# Altium PCB PCB1.PcbDoc (part 1 of 2)
Units mm, origin at the board's own origin, x right, y up, seen from the top; angles counter-clockwise.
Board outline 22.86 x 46 mm, 4 copper layers (Top Layer (sig), Plane (gnd), Plane2 (gnd), Bottom Layer (sig)), stack 0.603 mm thick; 57 components, 57 nets, 281 pads, 103 vias.
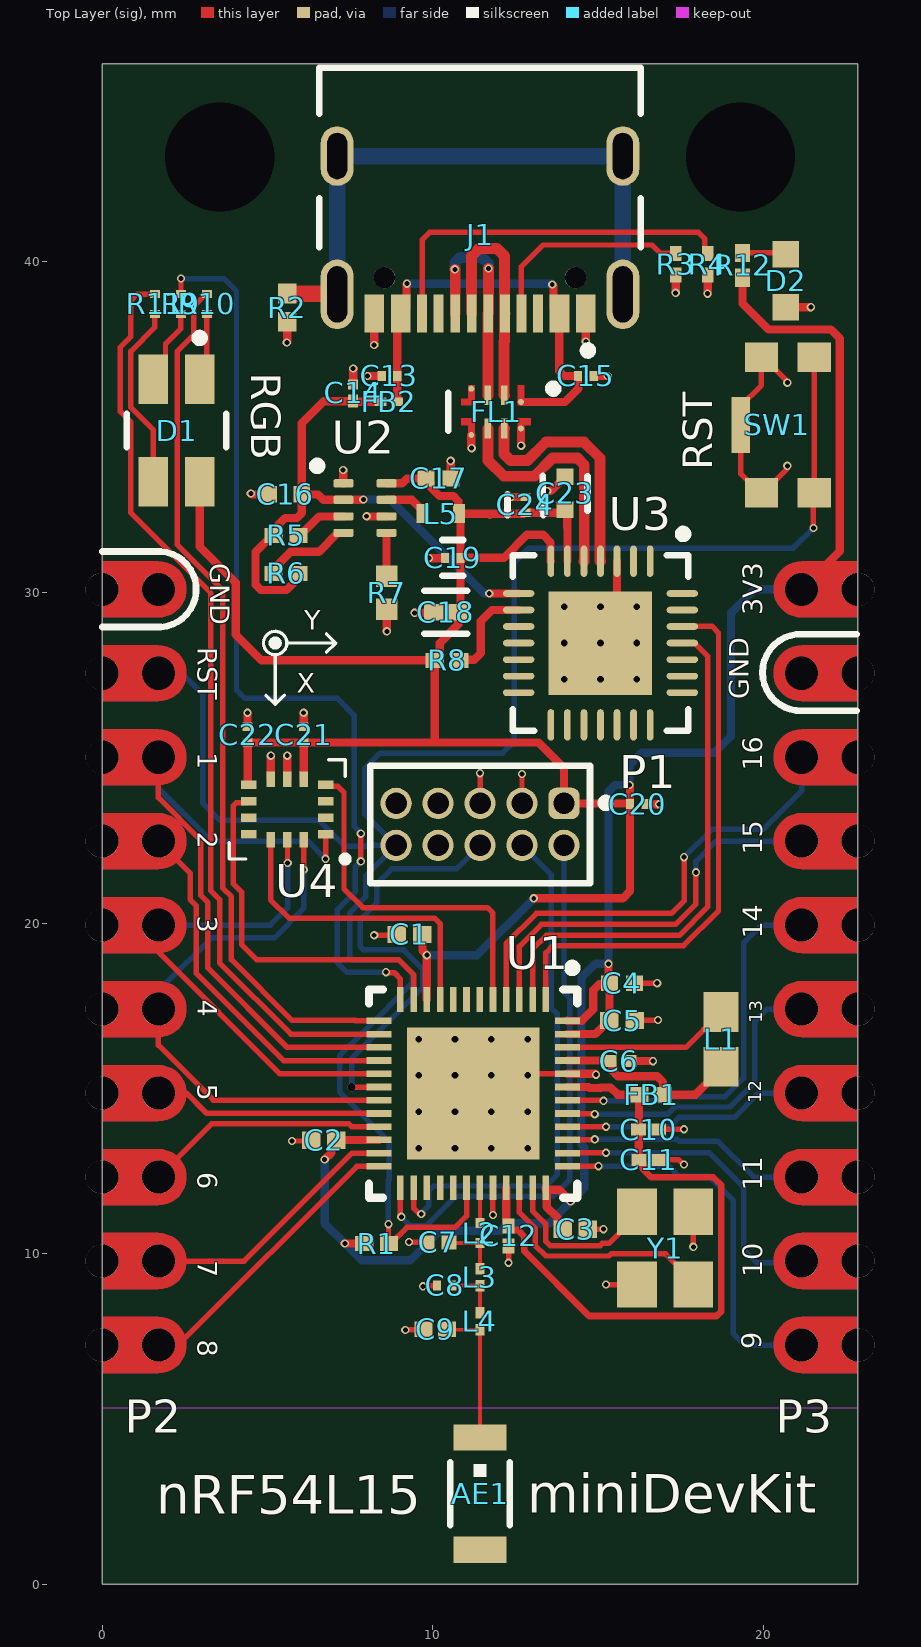
[diagram p0: Top Layer (sig) view]
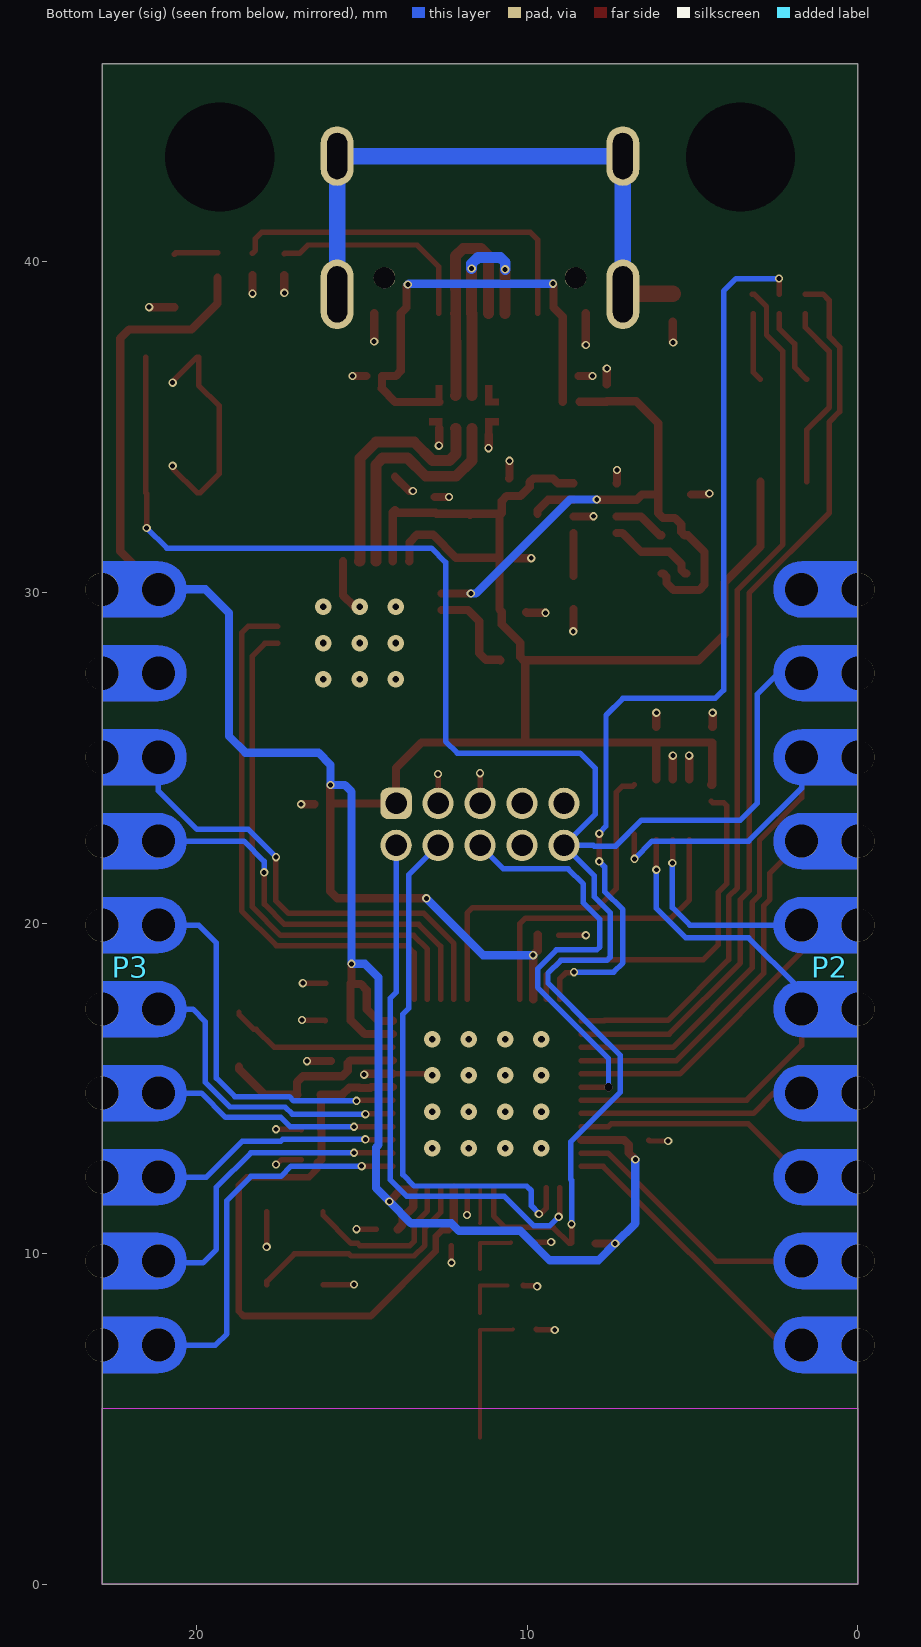
[diagram p1: Bottom Layer (sig) view, seen from below]
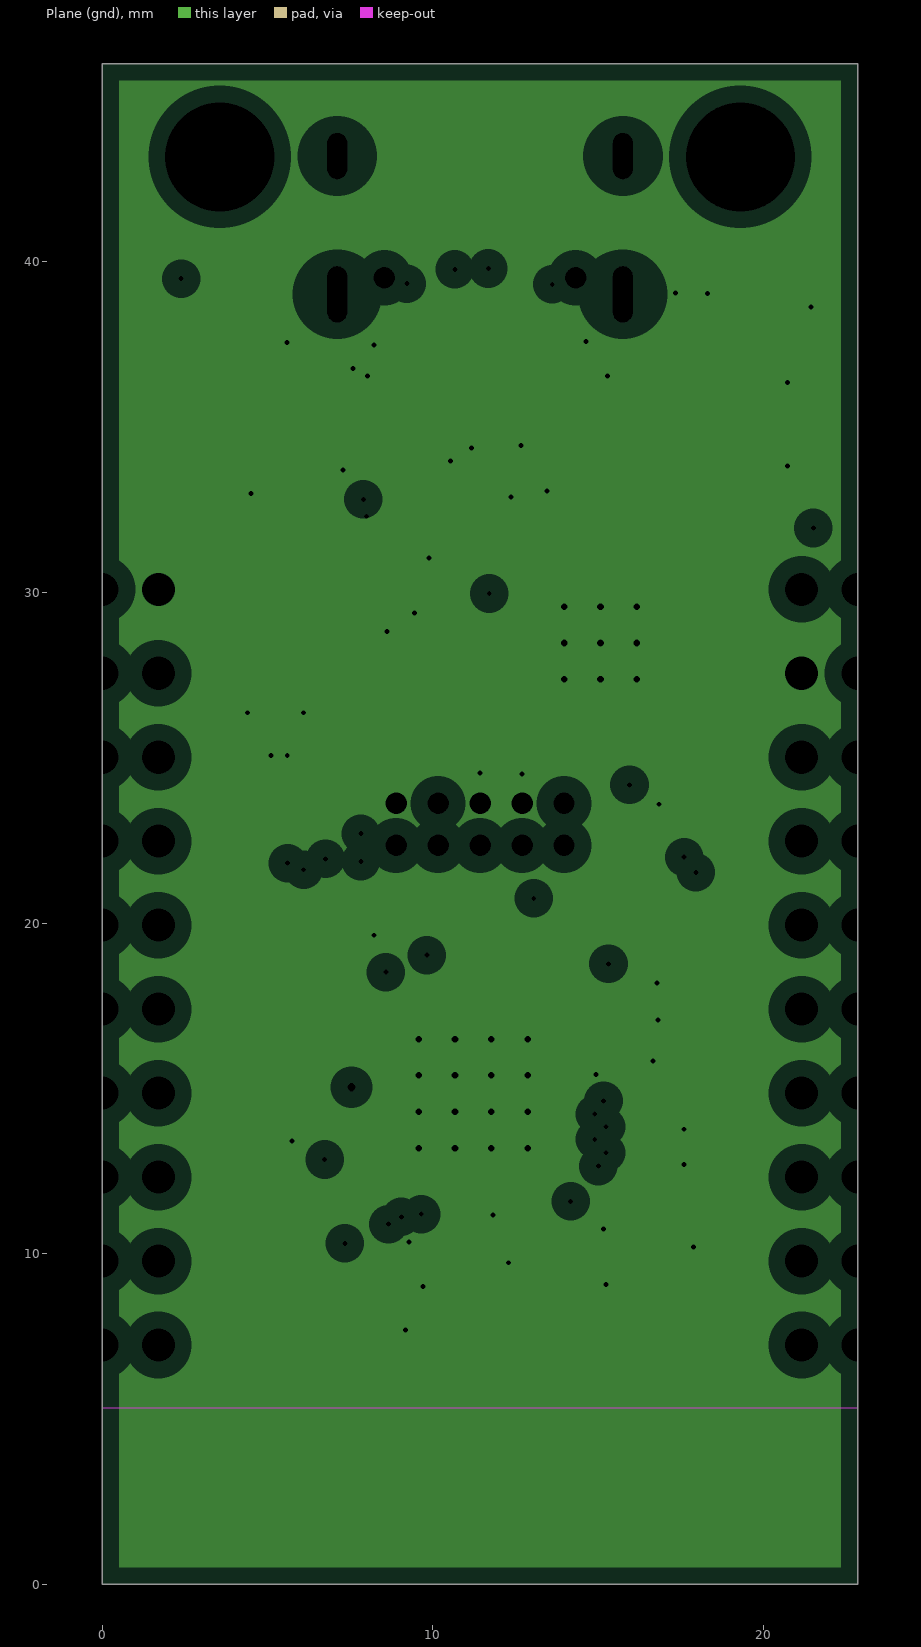
[diagram p2: Plane (gnd), clearances drawn from the general rule]
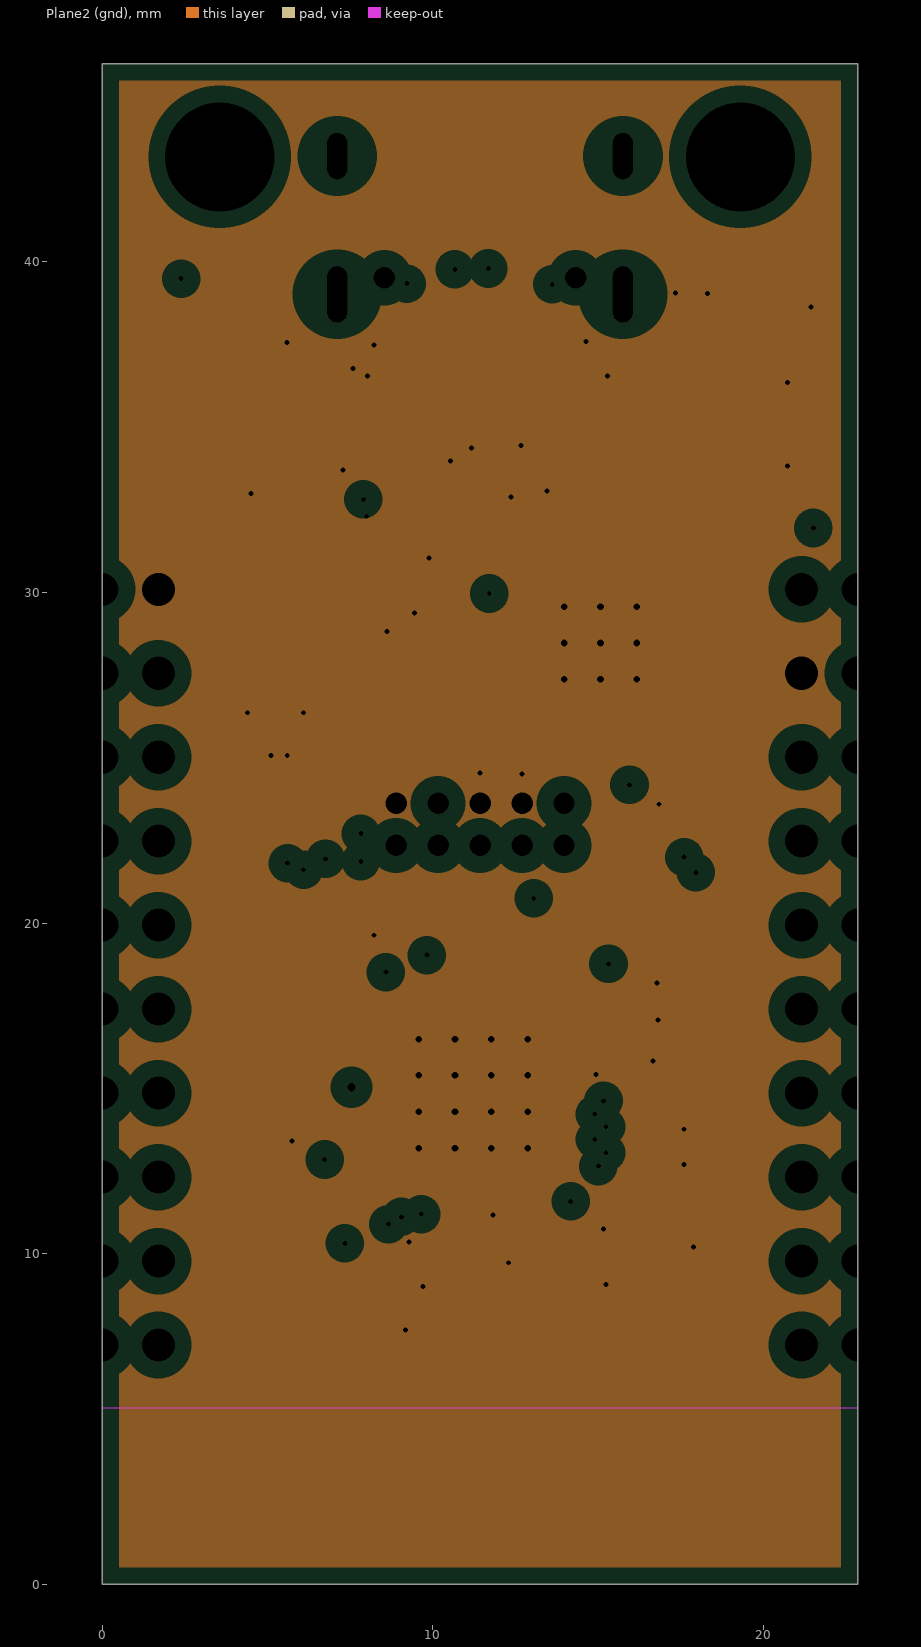
[diagram p3: Plane2 (gnd), clearances drawn from the general rule]
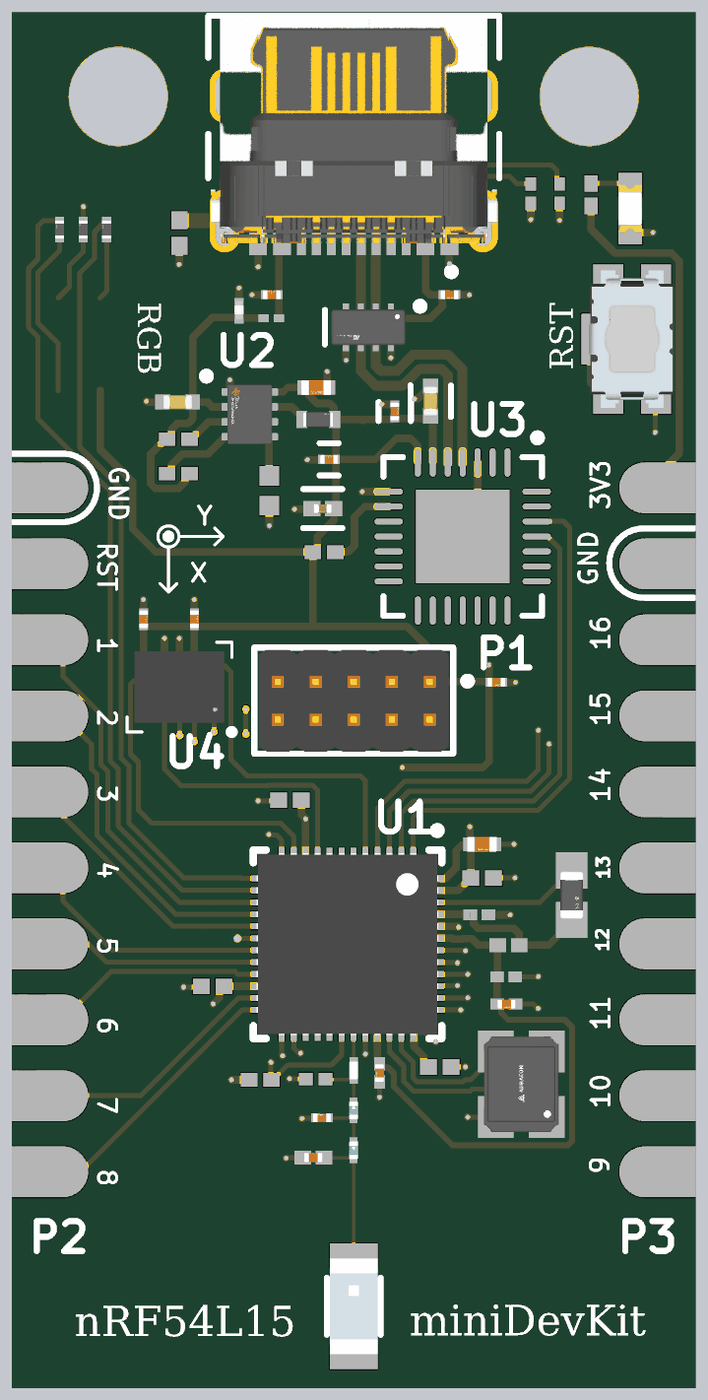
[diagram p4: 3D render of the assembled board from above, using the file's embedded part models]

## Layer stack, top to bottom
Top Solder: solder mask 0.0102, Solder Resist, Dk 3.5
Top Layer (sig): signal copper 0.0356
Dielectric 2: prepreg 0.0711, PP-006, Dk 4.1
Plane (gnd): plane copper 0.035, net GND
Dielectric 1: dielectric 0.32, FR-4, Dk 4.8
Plane2 (gnd): plane copper 0.035, net GND
Dielectric 3: prepreg 0.0711, PP-006, Dk 4.1
Bottom Layer (sig): signal copper 0.0356
Bottom Solder: solder mask 0.0102, Solder Resist, Dk 3.5

## Board outline
0,0 0,45.999 22.86,45.999 22.86,0

## Design rules (kind name [scope] priority, off if disabled: settings)
Clearance Clearance_1 [InComponent('P2','P3','J1')] p1: gap=0 ignorepadtopadclearanceinfootprint=FALSE
Clearance [All] p2: gap=0.15 ignorepadtopadclearanceinfootprint=FALSE
ComponentClearance [Not HasFootprint('Male_Headers_254_1x10') vs Not HasFootprint('Male_Headers_254_1x10')] p1: gap=0.254 collisioncheckmode=3 verticalgap=0.254 showdistances=FALSE
DiffPairsRouting [InDifferentialPairClass('All Differential Pairs')] p1: maxlimit=0.152 minlimit=0.152 mostfreqgap=0.152 toplayer_minwidth=0.33 toplayer_maxwidth=0.33 toplayer_prefwidth=0.33 bottomlayer_minwidth=0.33 bottomlayer_maxwidth=0.33 bottomlayer_prefwidth=0.33 impedanceprofiledriven=TRUE impedanceprofileid={C3FE540A-6831-4386-8260-1E42DD11D62C} impedanceprofilevalue=50.000000 maxuncoupledlength=12.7
HoleSize [All] p1: absolutevalues=TRUE maxlimit=6.3 minlimit=0.15 maxpercent=80.000 minpercent=20.000
HoleToHoleClearance [All] p1: gap=0.15 allowstackedmicrovias=TRUE
MinimumSolderMaskSliver [All] p1: minsoldermaskwidth=0.1
PlaneClearance [All] p1: clearance=0.508
PlaneConnect [All] p1: planeconnectstyle=Direct reliefexpansion=0.508 reliefentries=4 reliefconductorwidth=0.254 reliefairgap=0.254
PolygonConnect [All] p1: connectstyle=Relief reliefconductorwidth=0.254 reliefentries=4 polygonreliefangle="90 Angle" airgapwidth=0.254
RoutingVias [All] p1: holewidth=0.2 width=0.3 viastyle="Through Hole" minholewidth=0.15 minwidth=0.25 maxholewidth=1 maxwidth=1.5
ShortCircuit [Not InComponent('P2','P3') vs Not InComponent('P2','P3')] p1: allowed=FALSE
SilkToSolderMaskClearance [IsPad] p1: minsilkscreentomaskgap=0.15 clearancetoexposedcopper=TRUE
SolderMaskExpansion [All] p1: expansion=0.038 istentingtop=FALSE
SupplyNets "Schematic Supply Nets_3" [InNet('VBUS')] p1: voltage=0.000
SupplyNets "Schematic Supply Nets_2" [InNet('V_USB')] p2: voltage=0.000
SupplyNets "Schematic Supply Nets_1" [InNet('GND')] p3: voltage=0.000
SupplyNets "Schematic Supply Nets" [InNet('3V3')] p4: voltage=0.000
Width Width_1 [InNetClass('AntennaClass')] p1: maxlimit=0.116 minlimit=0.116 preferedwidth=0.116 impedanceprofiledriven=TRUE impedanceprofileid={DB60802E-1F74-4AC1-8945-EA78357C024C} impedanceprofilevalue=50.000000 minimp=50.000000 maximp=50.000000 favimp=50.000000
Width [All] p2: maxlimit=1 minlimit=0.165 preferedwidth=0.165
21 further rules are at their usual default settings.

## Classes and differential pairs
net class AntennaClass: NetAE1_1 NetC7_2 NetC8_1 NetL2_1
component class U_USB_UART_Bridge: C18 C19 C23 C24 R8 U3
component class U_Power: C16 C17 D2 L5 R5 R6 R7 R12 U2
component class U_MCU: AE1 C1 C2 C3 C4 C5 C6 C7 C8 C9 C10 C11 C12 D1 FB1 L1 L2 L3 L4 R1 R9 R10 R11 SW1 U1 Y1
component class U_IMU: C21 C22 U4
component class U_Connector: C13 C14 C15 C20 FB2 FL1 J1 P1 P2 P3 R2 R3 R4
differential pair USBD: +USBD_P -USBD_N
differential pair USB_D: +USB_D_P -USB_D_N

## Components (designator, comment, footprint, x,y, rotation, side; value= is the part's Value field where it differs from the comment)
AE1 "74889302450" 74889302450 11.43,2.743 r270 top locked
C1 "0.1uF" CAPC0603X33X15ML03T05 9.296,19.66 r0 top
C2 "0.1uF" CAPC0603X33X15ML03T05 6.707,13.437 r0 top
C3 "0.1uF" CAPC0603X33X15ML03T05 14.308,10.741 r180 top
C4 "10uF" FP-CL07-IPC_C 15.722,18.182 r0 top
C5 "0.1uF" CAPC0603X33X15ML03T05 15.726,17.053 r180 top
C6 "2.2uF" FP-CL03-IPC_B 15.632,15.828 r0 top
C7 "1.5pF" CAPC0603X33X15NL03T05 10.159,10.342 r0 top
C8 "2.0pF" FP-GRM033-0_03-MFG 10.363,9.042 r180 top
C9 "0.3pF" FP-GJM033-0_03-IPC_A 10.077,7.716 r180 top
C10 "2.2uF" FP-CL03-IPC_B 16.527,13.758 r0 top
C11 "10nF" FP-GRM033-0_03-IPC_B 16.537,12.841 r0 top
C12 "10nF" FP-GRM033-0_03-IPC_B 12.294,10.541 r270 top
C13 "0.10uF" FP-GRM033-0_03-MFG 8.692,36.553 r180 top
C14 "1uF" FP-CL03-IPC_C 7.594,36.042 r90 top
C15 "0.10uF" FP-GRM033-0_03-MFG 14.631,36.553 r0 top
C16 "4.7uF" FP-CC0402-MFG 5.541,32.967 r180 top value="4.7 uF"
C17 "10uF" FP-CL07-IPC_C 10.175,33.451 r0 top
C18 "1uF" FP-GRM033-0_09-IPC_A 10.393,29.406 r180 top
C19 "0.1uF" FP-GRM033-0_03-MFG 10.605,31.051 r180 top
C20 "0.10uF" FP-GRM033-0_03-MFG 16.201,23.602 r0 top
C21 "0.1uF" FP-GRM033-0_03-MFG 6.099,25.705 r90 top locked
C22 "0.1uF" FP-GRM033-0_03-MFG 4.402,25.705 r90 top locked
C23 "4.7UF" FP-CC0402-MFG 14,33 r90 top value="4.7 uF"
C24 "0.10uF" FP-GRM033-0_03-MFG 12.8,32.65 r90 top
D1 "150141M173100" WL-SFTW_3528_150141M173100 1272.249,-1235.1 r270 top
D2 "150060GS75000" WL-SMCW_0603_150060xx75000 20.673,39.431 r90 top
FB1 "BLM03AG121SN1D" FP-BLM03-0_03-d0_3-IPC_A 16.605,14.811 r180 top
FB2 "" FP-BLM03-0_03-d0_3-IPC_C 8.674,35.769 r180 top
FL1 "ECMF02-4CMX8" FP-Micro_QFN-8L-MFG 11.917,35.466 r270 top
J1 "USB4105-GF-A" FP-USB4105-GF-A-MFG 11.43,42.037 r180 top locked
L1 "4.7uH" FP-MLZ1608-IPC_A 18.72,16.485 r270 top
L2 "2.7nH" FP-LQP03HQ_02-MFG 11.428,10.625 r270 top
L3 "3.5nH" FP-LQP03TG_02-IPC_C 11.428,9.29 r270 top
L4 "3.5nH" FP-LQP03TG_02-IPC_C 11.428,7.958 r270 top
L5 "2.2uH" FP-MLZ1005-IPC_B 10.241,32.386 r0 top
P1 "62201021121" 62201021121 11.43,22.987 r180 top locked
P2 "1X10 2.54 male headers" Male_Headers_254_1x10 0.85,18.669 r90 bottom locked
P3 "1X10 2.54 male headers" Male_Headers_254_1x10 22.01,18.669 r270 bottom locked
R1 "1K" RESC0603X28X15ML05T05 8.305,10.311 r180 top
R2 "0" RESC1005X40X25NL05T10 5.598,38.616 r90 top
R3 "5.1K" RESC0603X26X15NL03T05 17.348,39.929 r90 top
R4 "5.1K" RESC0603X26X15NL03T05 18.315,39.934 r90 top
R5 "1K" RESC0603X28X15ML05T05 5.566,31.731 r0 top
R6 "1K" RESC0603X28X15ML05T05 5.562,30.577 r180 top
R7 "267K" RESC1005X40X25ML05T05 8.606,30 r90 top
R8 "1K" RESC0603X28X15ML05T05 10.438,27.95 r0 top
R9 "200" FP-ERJ1GN-MFG 2.382,38.729 r90 top value=200Ω
R10 "100" FP-ERJ1GN-MFG 3.166,38.729 r90 top value=200Ω
R11 "200" FP-ERJ1GN-MFG 1.598,38.729 r90 top value=200Ω
R12 "150" RESC0603X26X15ML03T05 19.369,39.898 r90 top
SW1 "435431019840" 435431019840 20.739,35.07 r90 top
U1 "nRF54L15" nRF54L15_QFN8_6X6 11.222,14.845 r270 top locked
U2 "TPS62840DLCR" FP-DLC0008B-MFG 7.951,32.554 r0 top
U3 "CP2102-GMR" SLAB-QFN-28-3125x3125TP_M 15.074,28.473 r270 top
U4 "BMI323" BMI323 5.599,23.438 r180 top locked
Y1 "32MHz" FP-ABM8G-MFG 17.03,10.168 r90 top

## Footprints (in the part's own frame and the unit in brackets; to place one, negate y for a bottom-side part, rotate by r counter-clockwise, add the part's x,y. Pads: shape width x height; smd on the part's side, far side on the other; paste and mask are expansions set on the pad)
62201021121 [mm] "Pin Header, pitch 1.27 mm, THT, Vertical, dual row, 10p"
  rrect50% 0.95x0.95 hole 0.65: 1(-2.54,-0.635)
  round 0.95 hole 0.65: 2(-2.54,0.635) 3(-1.27,-0.635) 4(-1.27,0.635) 5(0,-0.635) 6(0,0.635) 7(1.27,-0.635) 8(1.27,0.635) 9(2.54,-0.635) 10(2.54,0.635)
  silkscreen extent -3.93,-1.78 3.32,1.78, body extent -3.17,-1.7 3.18,1.7, height 5.33
74889302450 [mm] "SMT-Multilayer Chip Antenna, body 3.2x1.6mm"
  rect 0.8x1.6 smd: 1(-1.7,0) 2(1.7,0)
  silkscreen extent -0.95,-0.9 0.95,0.9, body extent -1.6,-0.8 1.6,0.8, height 1.2
435431019840 [mm] "Tact Switch, SMT, body 4.1x2.8mm"
  rect 0.9x1 smd: A1(-2.05,0.8) A2(2.05,0.8) B1(-2.05,-0.8) B2(2.05,-0.8)
  rect 1.7x0.55 smd: G1(0,1.425)
  body extent -2.3,-1.4 2.3,1.45, height 1.9
BMI323 [mm]
  rect 0.475x0.25 smd: 1(-1.162,0.75) 2(-1.162,0.25) 3(-1.162,-0.25) 4(-1.162,-0.75) 8(1.162,-0.75) 9(1.162,-0.25) 10(1.162,0.25) 11(1.162,0.75)
  rect 0.25x0.475 smd: 5(-0.5,-0.913) 6(0,-0.913) 7(0.5,-0.913) 12(0.5,0.913) 13(0,0.913) 14(-0.5,0.913)
  silkscreen extent -1.85,-1.5 1.75,1.6, body extent -1.5,-1.19 1.5,1.19, height 0.87
CAPC0603X33X15ML03T05 [mm] "Chip Capacitor, 2-Leads, Body 0.60x0.30mm, IPC Low Density"
  rect 0.56x0.52 smd: 1(-0.38,0) 2(0.38,0)
  body extent -0.31,-0.17 0.32,0.16, height 0.33
CAPC0603X33X15NL03T05 [mm] "Chip Capacitor, 2-Leads, Body 0.60x0.30mm, IPC Medium Density"
  rect 0.46x0.42 smd: 1(-0.33,0) 2(0.33,0)
  body extent -0.31,-0.17 0.32,0.16, height 0.33
FP-ABM8G-MFG [mm]
  rect 1.4x1.2 smd paste+0 mask+0: 1(-1.1,-0.85) 2(1.1,-0.85) 3(1.1,0.85) 4(-1.1,0.85)
  body extent -1.9,-1.55 1.9,1.55, height 0.25
FP-BLM03-0_03-d0_3-IPC_A [mm]
  rect 0.554x0.463 smd paste+0 mask+0: 1(-0.354,0) 2(0.354,0)
FP-BLM03-0_03-d0_3-IPC_C [mm]
  rect 0.354x0.263 smd paste+0 mask+0: 1(-0.254,0) 2(0.254,0)
FP-CC0402-MFG [mm]
  rect 0.5x0.5 smd paste+0 mask+0: 1(-0.5,0) 2(0.5,0)
  body extent -0.87,-0.48 0.87,0.48, height 0.25
FP-CL03-IPC_B [mm]
  rect 0.454x0.363 smd paste+0 mask+0: 1(-0.304,0) 2(0.304,0)
  body extent -0.68,-0.33 0.68,0.33, height 0.25
FP-CL03-IPC_C [mm]
  rect 0.402x0.303 smd paste+0 mask+0: 1(-0.251,0)
  rect 0.3x0.303 smd paste+0 mask+0: 2(0.251,0)
  body extent -0.55,-0.3 0.55,0.3, height 0.25
FP-CL07-IPC_C [mm]
  rect 0.515x0.472 smd paste+0 mask+0: 1(-0.379,0) 2(0.379,0)
  body extent -0.74,-0.38 0.74,0.38, height 0.25
FP-DLC0008B-MFG [mm]
  rrect40% 0.6x0.25 smd paste+0 mask+0: 1(-0.65,0.75) 2(-0.65,0.25) 3(-0.65,-0.25) 4(-0.65,-0.75) 5(0.65,-0.75) 6(0.65,-0.25) 7(0.65,0.25) 8(0.65,0.75)
  silkscreen extent -1.57,1.15 -1.32,1.4, body extent -1.05,-1.15 1.05,1.15, height 0.25
FP-ERJ1GN-MFG [mm]
  rect 0.25x0.3 smd paste+0 mask+0: 1(-0.3,0) 2(0.3,0)
  body extent -0.53,-0.27 0.53,0.27, height 0.25
FP-GJM033-0_03-IPC_A [mm]
  rect 0.554x0.463 smd paste+0 mask+0: 1(-0.354,0) 2(0.354,0)
  body extent -0.83,-0.43 0.83,0.43, height 0.25
FP-GRM033-0_03-IPC_B [mm]
  rect 0.454x0.363 smd paste+0 mask+0: 1(-0.304,0) 2(0.304,0)
  body extent -0.68,-0.33 0.68,0.33, height 0.25
FP-GRM033-0_03-MFG [mm]
  rect 0.25x0.3 smd paste+0 mask+0: 1(-0.238,0) 2(0.238,0)
  body extent -0.46,-0.27 0.46,0.27, height 0.25
FP-GRM033-0_09-IPC_A [mm]
  rect 0.577x0.503 smd paste+0 mask+0: 1(-0.363,0) 2(0.363,0)
  silkscreen extent -0.65,-0.65 0.65,0.65, body extent -0.85,-0.45 0.85,0.45, height 0.25
FP-LQP03HQ_02-MFG [mm]
  rect 0.3x0.275 smd paste+0 mask+0: 1(-0.3,0) 2(0.3,0)
  body extent -0.55,-0.27 0.55,0.26, height 0.25
FP-LQP03TG_02-IPC_C [mm]
  rect 0.354x0.263 smd paste+0 mask+0: 1(-0.254,0) 2(0.254,0)
  body extent -0.53,-0.27 0.53,0.26, height 0.25
FP-Micro_QFN-8L-MFG [mm]
  round 0.18 smd paste+0 mask+0: 1(-0.3,0.75) 4(-0.7,-0.75) 5(0.7,-0.75) 8(0.5,0.75)
  rect 0.6x0.2 smd paste+0 mask+0: 2(-0.5,0.25) 3(-0.5,-0.25) 6(0.5,-0.25) 7(0.5,0.25)
  Top Layer (sig) region: 0.2,1.05 0.4,1.05 0.4,0.85 0.8,0.85 0.8,0.65 0.2,0.65
  Top Layer (sig) region: 0.2,-1.05 0.4,-1.05 0.4,-0.85 0.8,-0.85 0.8,-0.65 0.2,-0.65
  Top Layer (sig) region: -0.2,-1.05 -0.4,-1.05 -0.4,-0.85 -0.8,-0.85 -0.8,-0.65 -0.2,-0.65
  Top Layer (sig) region: -0.2,1.05 -0.4,1.05 -0.4,0.85 -0.8,0.85 -0.8,0.65 -0.2,0.65
  silkscreen extent -0.83,-1.45 0.58,1.85, body extent -0.9,-1.38 0.9,1.38, height 0.25
FP-MLZ1005-IPC_B [mm]
  rect 0.372x0.572 smd paste+0 mask+0: 1(-0.55,0) 2(0.55,0)
  body extent -0.89,-0.44 0.89,0.44, height 0.25
FP-MLZ1608-IPC_A [mm]
  rect 1.206x1.058 smd paste+0 mask+0: 1(-0.826,0) 2(0.826,0)
  body extent -1.93,-1.03 1.93,1.03, height 0.25
FP-USB4105-GF-A-MFG [mm]
  rrect100% 1x2.1 hole 1.7 slot 0.6 at 0 deg paste-2539.97 mask+0: 1(-4.32,3.015) 2(4.32,3.015)
  rrect100% 1x1.8 hole 1.4 slot 0.6 at 0 deg paste-2539.97 mask+0: 3(-4.32,-1.165) 4(4.32,-1.165)
  rect 0.6x1.15 smd paste+0 mask+0: A1-B12(-3.2,3.59) A4-B9(-2.4,3.59) B1-A12(3.2,3.59) B4-A9(2.4,3.59)
  rect 0.3x1.15 smd paste+0 mask+0: A5(-1.25,3.59) A6(-0.25,3.59) A7(0.25,3.59) A8(1.25,3.59) B5(1.75,3.59) B6(0.75,3.59) B7(-0.75,3.59) B8(-1.75,3.59)
  round 0.65 hole 0.65 unplated paste-2539.97 mask+0: ""(-2.89,2.515) ""(2.89,2.515)
  silkscreen extent -4.86,-3.84 4.86,4.84, body extent -4.96,-3.94 4.96,4.27, height 0.25
Male_Headers_254_1x10 [mm]
  round 1 hole 1: 1(-11.43,0.85) 2(-8.89,0.85) 3(-6.35,0.85) 4(-3.81,0.85) 5(-1.27,0.85) 6(1.27,0.85) 7(3.81,0.85) 8(6.35,0.85) 9(8.89,0.85) 10(11.43,0.85) ""(-11.43,-0.85) ""(-8.89,-0.85) ""(-6.35,-0.85) ""(-3.81,-0.85) ""(-1.27,-0.85) ""(1.27,-0.85) ""(3.81,-0.85) ""(6.35,-0.85) ""(8.89,-0.85) ""(11.43,-0.85)
  Multi-Layer region: -2.12,-0.85 -0.42,-0.85 -0.42,0.85 -0.504,1.219 -0.74,1.515 -1.081,1.679 -1.459,1.679 -1.8,1.515 -2.036,1.219 -2.12,0.85 -2.12,0.85
  Multi-Layer region: 0.42,-0.85 2.12,-0.85 2.12,0.85 2.036,1.219 1.8,1.515 1.459,1.679 1.081,1.679 0.74,1.515 0.504,1.219 0.42,0.85 0.42,0.85
  Multi-Layer region: -4.66,-0.85 -2.96,-0.85 -2.96,0.85 -3.044,1.219 -3.28,1.515 -3.621,1.679 -3.999,1.679 -4.34,1.515 -4.576,1.219 -4.66,0.85 -4.66,0.85
  Multi-Layer region: 2.96,-0.85 4.66,-0.85 4.66,0.85 4.576,1.219 4.34,1.515 3.999,1.679 3.621,1.679 3.28,1.515 3.044,1.219 2.96,0.85 2.96,0.85
  Multi-Layer region: 5.5,-0.85 7.2,-0.85 7.2,0.85 7.116,1.219 6.88,1.515 6.539,1.679 6.161,1.679 5.82,1.515 5.584,1.219 5.5,0.85 5.5,0.85
  Multi-Layer region: -7.2,-0.85 -5.5,-0.85 -5.5,0.85 -5.584,1.219 -5.82,1.515 -6.161,1.679 -6.539,1.679 -6.88,1.515 -7.116,1.219 -7.2,0.85 -7.2,0.85
  Multi-Layer region: -9.74,-0.85 -8.04,-0.85 -8.04,0.85 -8.124,1.219 -8.36,1.515 -8.701,1.679 -9.079,1.679 -9.42,1.515 -9.656,1.219 -9.74,0.85 -9.74,0.85
  Multi-Layer region: -12.28,-0.85 -10.58,-0.85 -10.58,0.85 -10.664,1.219 -10.9,1.515 -11.241,1.679 -11.619,1.679 -11.96,1.515 -12.196,1.219 -12.28,0.85 -12.28,0.85
  Multi-Layer region: 8.04,-0.85 9.74,-0.85 9.74,0.85 9.656,1.219 9.42,1.515 9.079,1.679 8.701,1.679 8.36,1.515 8.124,1.219 8.04,0.85 8.04,0.85
  Multi-Layer region: 10.58,-0.85 12.28,-0.85 12.28,0.85 12.196,1.219 11.96,1.515 11.619,1.679 11.241,1.679 10.9,1.515 10.664,1.219 10.58,0.85 10.58,0.85
nRF54L15_QFN8_6X6 [mm] "nRF54L15_QFN8_6X6, 48-Leads, Body 6,00x6,00mm, Pitch 0,40mm, Thermal Pad 4,60x4,60mm, IPC High Density"
  rect 0.75x0.2 smd: 1(-2.85,2.2) 2(-2.85,1.8) 3(-2.85,1.4) 4(-2.85,1) 5(-2.85,0.6) 6(-2.85,0.2) 7(-2.85,-0.2) 8(-2.85,-0.6) 9(-2.85,-1) 10(-2.85,-1.4) 11(-2.85,-1.8) 12(-2.85,-2.2) 25(2.85,-2.2) 26(2.85,-1.8) 27(2.85,-1.4) 28(2.85,-1) 29(2.85,-0.6) 30(2.85,-0.2) 31(2.85,0.2) 32(2.85,0.6) 33(2.85,1) 34(2.85,1.4) 35(2.85,1.8) 36(2.85,2.2)
  rect 0.2x0.75 smd: 13(-2.2,-2.85) 14(-1.8,-2.85) 15(-1.4,-2.85) 16(-1,-2.85) 17(-0.6,-2.85) 18(-0.2,-2.85) 19(0.2,-2.85) 20(0.6,-2.85) 21(1,-2.85) 22(1.4,-2.85) 23(1.8,-2.85) 24(2.2,-2.85) 37(2.2,2.85) 38(1.8,2.85) 39(1.4,2.85) 40(1,2.85) 41(0.6,2.85) 42(0.2,2.85) 43(-0.2,2.85) 44(-0.6,2.85) 45(-1,2.85) 46(-1.4,2.85) 47(-1.8,2.85) 48(-2.2,2.85)
  rect 4x4 smd: 49(0,0)
  silkscreen extent -3.92,-3.15 3.15,3.15, body extent -3.04,-3.04 3.04,3.04, height 0.9
RESC0603X26X15ML03T05 [mm] "Chip Resistor, 2-Leads, Body 0.60x0.30mm, IPC Low Density"
  rect 0.55x0.45 smd: 1(-0.375,0) 2(0.375,0)
  body extent -0.32,-0.16 0.32,0.17, height 0.26
RESC0603X26X15NL03T05 [mm] "Chip Resistor, 2-Leads, Body 0.60x0.30mm, IPC Medium Density"
  rect 0.45x0.35 smd: 1(-0.325,0) 2(0.325,0)
  body extent -0.32,-0.16 0.32,0.17, height 0.26
RESC0603X28X15ML05T05 [mm] "Chip Resistor, 2-Leads, Body 0.60x0.30mm, IPC Low Density"
  rect 0.55x0.45 smd: 1(-0.375,0) 2(0.375,0)
  body extent -0.33,-0.17 0.33,0.18, height 0.28
RESC1005X40X25ML05T05 [mm] "Chip Resistor, 2-Leads, Body 1.00x0.50mm, IPC Low Density"
  rect 0.65x0.65 smd: 1(-0.5,0) 2(0.5,0)
  body extent -0.53,-0.27 0.53,0.28, height 0.4
RESC1005X40X25NL05T10 [mm] "Chip Resistor, 2-Leads, Body 1.00x0.50mm, IPC Medium Density"
  rect 0.6x0.55 smd: 1(-0.425,0) 2(0.425,0)
  body extent -0.53,-0.27 0.53,0.28, height 0.4
SLAB-QFN-28-3125x3125TP_M [mm] "QFN, 28-Leads, Body 5x5mm, Pitch 0.5mm, Thermal Pad 3.13x3.13mm, IPC Low Density"
  oval 0.95x0.2 smd: 1(-2.475,1.5) 2(-2.475,1) 3(-2.475,0.5) 4(-2.475,0) 5(-2.475,-0.5) 6(-2.475,-1) 7(-2.475,-1.5) 15(2.475,-1.5) 16(2.475,-1) 17(2.475,-0.5) 18(2.475,0) 19(2.475,0.5) 20(2.475,1) 21(2.475,1.5)
  oval 0.2x0.95 smd: 8(-1.5,-2.475) 9(-1,-2.475) 10(-0.5,-2.475) 11(0,-2.475) 12(0.5,-2.475) 13(1,-2.475) 14(1.5,-2.475) 22(1.5,2.475) 23(1,2.475) 24(0.5,2.475) 25(0,2.475) 26(-0.5,2.475) 27(-1,2.475) 28(-1.5,2.475)
  rect 3.13x3.13 smd: 29(0,0)
  silkscreen extent -3.42,-2.65 2.65,2.65, body extent -2.5,-2.5 2.5,2.5, height 1
WL-SFTW_3528_150141M173100 [mm] "SMT Full-color TOP LED Waterclear, body 3.5x2.8mm"
  rect 1.5x0.9 smd: 1(-1268.45,-1269.3) 2(-1268.45,-1270.7) 3(-1271.55,-1269.3) 4(-1271.55,-1270.7)
  silkscreen extent -1272.92,-1271.5 -1269.5,-1268.5, body extent -1271.75,-1271.4 -1268.25,-1268.6, height 1.9
WL-SMCW_0603_150060xx75000 [mm] "SMD Mono-color Chip LED, body 1.60 x 0.80 mm"
  rect 0.8x0.8 smd: 1(-0.8,0) 2(0.8,0)
  body extent -0.8,-0.4 0.8,0.4, height 0.7

## Part data
AE1: library part CMP-03913-126098687-1, "74889302450 Chip Antenna, 2.45Ghz, 3.2Mm X 1.6Mm X 1.2Mm Rohs Compliant: Yes", Current Rating=2A, Max Operating Temperature=85°C, Min Operating Temperature=-40°C, Height=1.2mm, Impedance=50Ω, Length=3.2mm, NexarPartId=126098687, RoHS=Compliant, Width=1.6mm
C1 C2 C3 C5: library part CMP-2010-00674-1, Manufacturer=Samsung, Part Number=CL03A104KQ3NNNC
C4 C17: library part CMP-13271-002778-1, "Cap Ceramic 10uF 10V X5R ±20% SMD 0402 +85°C Paper T/R", Case Code (Imperial)=0402, Case Code (Metric)=1005, Max Operating Temperature=85°C, Min Operating Temperature=-55°C, Tolerance=20%, Voltage Rating=10V, Capacitance=10uF, Case/Package=0402, Length=0.039inch, Mount="Surface Mount", Packaging="Tape and Reel", Thickness=0.035inch, Width=0.02inch
C6 C10: library part CMP-13271-002263-1, "Cap Ceramic 2.2uF 10V X5R ±20% Pad SMD 0201 +85°C T/R", Case Code (Imperial)=0201, Case Code (Metric)=0603, Max Operating Temperature=85°C, Min Operating Temperature=-55°C, Tolerance=20%, Voltage Rating=10V, Capacitance=2.2uF, Case/Package=0201, Lead Free="Lead Free", Length=0.024inch, Mount="Surface Mount", Packaging="Tape and Reel", Thickness=0.013inch, Width=0.012inch
C7: library part CMP-1033-00061-2, Manufacturer="AVX Interconnect / Elco", Part Number=02013A1R5CAT2A
C8: library part CMP-2010-01348-2, "Chip Multilayer Ceramic Capacitors for General Purpose, 0201, 2.0pF, C0G, 30ppm/°C, 0.25pF, 25V", Capacitance=2pF, Case Code (Imperial)=0201, Case Code (Metric)=0603, Dielectric=C0G, Max Operating Temperature=125°C, Min Operating Temperature=-55°C, Package Quantity=15000, Voltage Rating=25V, Case/Package=0201, Height=0.3mm, Lead Free="Lead Free", Length=0.024inch, Mount="Surface Mount", Packaging="Tape and Reel", REACH SVHC="No SVHC", Termination=SMD/SMT, Thickness=0.013inch, Voltage Rating (DC)=25V, Width=0.012inch
C9: library part CMP-2010-00788-2, "Ceramic Capacitor 0.3pF ±0.05pF 25V C0G 0201 (0603 Metric)", Case Code (Imperial)=0201, Case Code (Metric)=0603, Dielectric=C0G, Max Operating Temperature=125°C, Min Operating Temperature=-55°C, Package Quantity=15000, Voltage Rating=25V, Capacitance=0.3pF, Case/Package=0201, Depth=0.3mm, Height=0.3mm, Lead Free="Lead Free", Length=0.6mm, Mount="Surface Mount", Packaging="Tape and Reel", Radiation Hardening=No, Termination=SMD/SMT, Thickness=0.013inch, Voltage Rating (DC)=25V, Width=0.3mm
C11 C12: library part CMP-2010-01684-2, "Chip Multilayer Ceramic Capacitors for General Purpose, 0201, 10000pF, X7R, 15%, 10%, 10V", Case Code (Imperial)=0201, Case Code (Metric)=0603, Dielectric=X7R, Max Operating Temperature=125°C, Min Operating Temperature=-55°C, Package Quantity=1, Tolerance=10%, Voltage=10V, Capacitance=10nF, Case/Package=0201, Depth=0.3mm, Height=0.3mm, Lead Free="Lead Free", Length=0.6mm, Material=Ceramic, Mount="Surface Mount", Packaging="Tape and Reel", Radiation Hardening=No, REACH SVHC="No SVHC", Termination=SMD/SMT, Thickness=0.013inch, Voltage Rating=10V, Voltage Rating (DC)=10V, Width=0.012inch
C13 C15 C19 C20 C21 C22 C24: library part CMP-06035-019037-1, "Chip Multilayer Ceramic Capacitors for General Purpose, 0201, 0.10uF, X7S, 22%, 10%, 16V", Capacitance=100nF, Case Code (Imperial)=0201, Case Code (Metric)=0603, Dielectric=X7S, Max Operating Temperature=125°C, Min Operating Temperature=-55°C, Package Quantity=15000, Tolerance=10%, Voltage Rating=16V, Case/Package=0201, Height=0.3mm, Length=0.024inch, Mount="Surface Mount", Packaging="Tape and Reel", Termination=SMD/SMT, Thickness=0.013inch, Voltage Rating (DC)=16V, Weight=1.2E-05oz, Width=0.3mm
C14: library part CMP-13271-000008-1, "CAP CER 1UF 16V X5R 0201", Manufacturer="Samsung Electro-Mechanics", Manufacturer Part Number=CL03A105MO3NRNH, Package=CL03, Temperature="-55°C to +85°C", Temperature Characteristic=X5R, Temperature Coefficient=15%, Temperature Range High=+85°C, Temperature Range Low=-55°C, Tolerance=20%, Voltage Rating=16V, Automotive=No, Capacitance=1uF, Category=Cap, ComponentLink2Description=Datasheet, ComponentLink2URL=http://www.samsungsem.com/global/front/downloadcms.do?path=%2F%2Fglobal%2F%2Fsupport%2F%2Fproduct-search%2F%2Fmlcc%2F%2F__icsFiles%2F%2Fafieldfile%2F%2F2018%2F%2F06%2F%2F21&fileName=CL03A105MO3NRNH.pdf, Device Class L1="Passive Components", Device Class L2=Capacitors, Device Class L3="Ceramic Capacitors", Digikey Description="CAP CER 1UF 16V X5R 0201", Height=0.39mm, Ipc Land Pattern Name=CAPC6030X30, Lead Free=Yes, Material=Ceramic, Octopart=https://octopart.com/cl03a105mo3nrnh-samsung-47681184, RoHS=TRUE
C16 C23: library part CMP-03422-000819-1, "CAP CER 4.7UF 16V X5R 0402", Capacitance="4.7 uF", Manufacturer=YAGEO, Manufacturer Part Number=CC0402MRX5R7BB475, Package=CC0402, Temperature="-55°C to +125°C", Temperature Characteristic=X5R, Temperature Coefficient=30ppm/°C, Temperature Range High=+125°C, Temperature Range Low=-55°C, Tolerance=0.2, Voltage Rating="16 V", Automotive=No, Automotive Grade=NA, Category=Cap, ComponentLink2Description=Datasheet, ComponentLink2URL=http://www.yageo.com/documents/recent/UPY-GP_NP0_16V-to-50V_16.pdf, Device Class L1="Passive Components", Device Class L2=Capacitors, Device Class L3="Ceramic Capacitors", Digikey Description="CAP CER 4.7UF 16V X5R 0402", Footprint Url=http://www.yageo.com/exep/pages/download/literatures/UPY-C_GEN_24.pdf, Height=0.55mm, Ipc Land Pattern Name=CAPC10050X50, Lead Free=Yes, Material=Ceramic, Mouser Description="Multilayer Ceramic Capacitors MLCC - SMD/SMT 4.7uF 16V 20% Ceramic Capacitor", Octopart=https://octopart.com/cc0402mrx5r7bb475-yageo-81932628, RoHS=TRUE
C18: library part CMP-06035-002798-1, "Chip Multilayer Ceramic Capacitors for General Purpose, 0201, 1.0uF, X5R, 15%, 20%, 10V", Case Code (Imperial)=0201, Case Code (Metric)=0603, Dielectric=X5R, Max Operating Temperature=85°C, Min Operating Temperature=-55°C, Tolerance=20%, Voltage Rating=10V, Capacitance=1uF, Case/Package=0201, Length=0.024inch, Mount="Surface Mount", Packaging="Tape and Reel", Thickness=0.015inch, Voltage Rating (DC)=10V, Width=0.012inch
D1: library part CMP-1431-00001-2, Case Code (Imperial)=1411, Case Code (Metric)=3528, Color="Green, Red", Forward Current=100mA, Forward Voltage=3.2V, Max Operating Temperature=85°C, Max Reverse Voltage (DC)=5V, Min Operating Temperature=-40°C, Power Dissipation=72mW, Test Current=20mA, Case/Package=1411, Dominant Wavelength=520nm, Height=1.9mm, Length=3.5mm, Lens Style="Clear, Round", Luminous Intensity=230mcd, Mount="Surface Mount", NexarPartId=29717795, Number of Pins=4, Packaging="Tape and Reel", Peak Wavelength=465nm, REACH SVHC=Unknown, RoHS=Compliant, Viewing Angle=120°, Wavelength=470nm, Width=2.8mm
D2: library part CMP-1426-00002-4, "430mcd Colorless transparence 520nm Emerald 140° LED0603 Light Emitting Diodes (LED) ROHS", Case Code (Imperial)=0603, Case Code (Metric)=1608, Color=Green, Forward Current=100mA, Forward Voltage=3.2V, Max Junction Temperature (Tj)=95°C, Max Operating Temperature=85°C, Max Reverse Voltage (DC)=5V, Min Operating Temperature=-40°C, Output Current=10µA, Power Dissipation=105mW, Test Current=20mA, Case/Package=0603, Dominant Wavelength=525nm, Height=700µm, Lead Free="Lead Free", Length=1.6mm, Lens Style="Clear, Rectangular", Luminous Intensity=430mcd, Mount="Surface Mount", Packaging="Tape and Reel", Peak Wavelength=515nm, REACH SVHC=Unknown, Reverse Voltage=5V, RoHS=Compliant, Viewing Angle=140°, Wavelength=525nm, Width=800µm
FB1: library part CMP-0686-00046-3, "Ferrite Bead, 0201, 120Ω @ 100MHz, 25%, 0.5Ω, 200mA", Case Code (Imperial)=0201, Case Code (Metric)=0603, Current Rating=200mA, DC Resistance (DCR)=500mR, Frequency=100MHz, Max Operating Temperature=125°C, Min Operating Temperature=-55°C, Package Quantity=1, Tolerance=25%, Case/Package=0201, Core Material=Ferrite, DC Resistance-Max=500mR, Depth=0.33mm, Height=0.3mm, Impedance=120R, Lead Free="Lead Free", Length=0.6mm, Material=Steel, Max Current Rating=200mA, Max DC Current=200mA, Number of Circuits=1, Number of Lines=1, Number of Pins=2, Packaging="Tape and Reel", REACH SVHC="No SVHC", RoHS Compliant=Yes, Series=BLM03AG, Shielding=Unshielded, Termination=SMD/SMT, Test Frequency=100MHz, Width=0.3mm
FB2: library part CMP-06046-002105-1, "BLM03EB500SH1D, Ferrite Bead, 0201, 50Ω @ 100MHz, 25%, 0.58Ω, 400mA", RoHS Compliant=Yes
FL1: library part CMP-12075-000002-1, "COMMON MODE CHOKE 2LN SMD ESD", Case/Package=QFN, DC Resistance (DCR)=4R, Max Operating Temperature=85°C, Min Operating Temperature=-30°C, Package Quantity=3000, Depth=1.25mm, Height=0.022inch, Lead Free="Lead Free", Length=0.098inch, Mount="Surface Mount", Number of Lines=2, Number of Pins=8, Packaging="Tape and Reel", REACH SVHC="No SVHC", Termination=Flat, Width=0.047inch
J1: library part CMP-245163-000001-1, "CONN RCPT USB2.0 TYPEC 5A", Current Rating=5/6.25/1.25/0.25A, Manufacturer=GCT, Package=0, Temperature="-40°C to +85°C", Temperature Range High=+85°C, Temperature Range Low=-40°C, Voltage Rating=20V, Automotive=No, Category=Conn, ComponentLink2Description=Datasheet, ComponentLink2URL=https://gct.co/files/drawings/usb4105.pdf, Conn Orientation="Right Angle", Contact Material=Gold,Nickel, Device Class L1=Connectors, Device Class L2="USB Connectors", Device Class L3=unset, Digikey Description="CONN RCPT USB2.0 TYPEC 5A", Height=3.46mm, Is Female=yes, Lead Free=Yes, Manufacturer Part Number=USB4105-GF-A, Number Of Contacts=16, Octopart=https://octopart.com/usb4105-gf-a-gct-106627878, RoHS=TRUE, Usb Standard="USB 2.0"
L1: library part CMP-08253-000311-1, "Shielded Multilayer Inductor 4.7uH ±20% 350mA 650mΩ SMD 0603", Case Code (Imperial)=0603, Case Code (Metric)=1608, Current Rating=350mA, DC Resistance (DCR)=650mR, Max Operating Temperature=125°C, Min Operating Temperature=-55°C, Package Quantity=4000, Saturation Current=120mA, Self Resonant Frequency=80MHz, Test Frequency=2MHz, Tolerance=20%, Case/Package=0603, Core Material=Ferrite, Height - Seated (Max)=0.037inch, Inductance=4.7uH, Length=0.063inch, Mount="Surface Mount", Packaging="Tape and Reel", RoHS Compliant=Yes, Shielding=Shielded, Width=0.031inch
L2: library part CMP-06042-004733-1, "Film type RF Inductor 2.7nH ±0.1nH 600mA 0.12Ω 0201 (0603)", Case Code (Imperial)=0201, Case Code (Metric)=0603, Current Rating=600mA, DC Resistance (DCR)=120mR, Max Operating Temperature=125°C, Min Operating Temperature=-55°C, Resistor Type="Thin Film", Self Resonant Frequency=9GHz, Test Frequency=500MHz, Case/Package=0201, Core Material=Non-Magnetic, Inductance=2.7nH, Mount="Surface Mount", Packaging="Tape and Reel", Shielding=Unshielded
L3 L4: library part CMP-06042-011870-1, "Film type RF Inductor 3.5nH ±0.1nH 450mA 0.25Ω 0201 (0603)", Case Code (Imperial)=0201, Case Code (Metric)=0603, Current Rating=450mA, DC Resistance (DCR)=250mR, Max Operating Temperature=125°C, Min Operating Temperature=-55°C, Package Quantity=15000, Resistor Type="Thin Film", Self Resonant Frequency=7GHz, Test Frequency=500MHz, Case/Package=0201, Core Material=Non-Magnetic, Height=0.3mm, Height - Seated (Max)=0.013inch, Inductance=3.5nH, Lead Free="Lead Free", Length=0.024inch, Max DC Current=450mA, Mount="Surface Mount", Packaging="Tape and Reel", Q Factor=14, Shielding=Unshielded, Termination=SMD/SMT, Width=0.012inch
L5: library part CMP-08253-000201-1, "Shielded Multilayer Inductor 2.2uH ±20% 350mA 715mΩ SMD 0402", Case Code (Imperial)=0402, Case Code (Metric)=1005, Current Rating=350mA, DC Resistance (DCR)=715mR, Max Operating Temperature=125°C, Min Operating Temperature=-55°C, Package Quantity=10000, Saturation Current=60mA, Self Resonant Frequency=120MHz, Test Frequency=2MHz, Tolerance=20%, Case/Package=0402, Core Material=Ferrite, Height - Seated (Max)=0.022inch, Inductance=2.2uH, Length=0.039inch, Mount="Surface Mount", Packaging="Tape and Reel", RoHS Compliant=Yes, Shielding=Shielded, Width=0.02inch
P1: library part CMP-1502-00948-3, Color=Black, Contact Resistance=20mΩ, Current Rating=1A, Max Operating Temperature=105°C, Min Operating Temperature=-40°C, Operating Supply Voltage=100V, Connector Type="Male Pin", Contact Material=Copper, Contact Mating Length=3.81mm, Contact Plating=Gold, Gender=Male, Height=5.65mm, Lead Pitch=1.27mm, Mount="Through Hole", NexarPartId=32855586, Number Of Contacts=10, Number of Pins=10, Number of Positions=10, Number of Rows=2, Orientation=Vertical, Packaging=Box, Pitch=1.27mm, REACH SVHC=Unknown, RoHS=Compliant, Row Spacing=1.27mm, Termination=Solder, Voltage Rating=100V
P2 P3: library part Male_Headers_254_1x10
R1 R5 R6 R8: library part CMP-2004-00209-1, Manufacturer="Vishay Dale", Part Number=CRCW02011K00FNED
R2: library part CMP-1011-00001-2, Manufacturer="Yageo / Phycomp", Part Number=RC0402JR-070RL
R3 R4: library part CMP-2004-02525-1, Manufacturer=Multicomp, Part Number=MCRE000157
R7: library part CMP-2002-00823-1, Manufacturer=Panasonic, Part Number=ERJ-2RKF2673X
R9 R10 R11: library part CMP-2004-03479-2, "RES SMD 200 OHM 1% 1/20W 0201", Manufacturer="Panasonic Electronic Components", Manufacturer Part Number=ERJ-1GNF2000C, Package=ERJ1GN, Power Rating=0.05W, Resistance=200Ω, Temperature="-55°C to +125°C", Temperature Coefficient=200ppm/°C, Temperature Range High=+125°C, Temperature Range Low=-55°C, Tolerance=1%, Voltage Rating=25V, Automotive=Yes, Automotive Grade="Grade 1", Category=Res, ComponentLink2Description=Datasheet, ComponentLink2URL=https://industrial.panasonic.com/cdbs/www-data/pdf/RDA0000/AOA0000C304.pdf, Composition="Thick Film", Device Class L1="Passive Components", Device Class L2=Resistors, Device Class L3="Chip SMD Resistors", Digikey Description="RES SMD 200 OHM 1% 1/20W 0201", Footprint Url=https://industrial.panasonic.com/cdbs/www-data/pdf/RDA0000/DMA0000COL17.pdf, Height=0.26mm, Lead Free=Yes, Mouser Description="Thick Film Resistors - SMD 0201 200ohm 1% HalogenFree AEC-Q200", Octopart=https://octopart.com/erj-1gnf2000c-panasonic-55419768, RoHS=TRUE, Series=ERJ
R12: library part CMP-2004-03464-1, Manufacturer=Panasonic, Part Number=ERJ1GNF1500C
SW1: library part CMP-03913-134708202-2, "Tactile Switch, 0.05A, 32VDC, SMD, 400GF Rohs Compliant: Yes", Current Rating=50mA, Insulation Resistance=1GΩ, Max Operating Temperature=125°C, Min Operating Temperature=-55°C, Voltage Rating=32V, Contact Plating=Silver, Packaging="Tape and Reel", RoHS=Compliant
U1: library part nRF54L15_QFN8_6X6, "Ultra-low-power wireless SoC"
U2: library part CMP-04918-000086-1, "ULTRA LOW IQ BUCK CONVERTER", Manufacturer="Texas Instruments", Max Junction Temp=+125°C, Max Supply Voltage=6.5V, Min Supply Voltage=1.8V, Nominal Supply Current=0.005-3000uA, Output Current=750mA, Output Voltage=1.8-3.3V, Package=DLC0008B, Switching Frequency=1.8MHz, Temperature="-40°C to +125°C", Temperature Range Low=-40°C, Automotive=No, Category=IC, ComponentLink2Description=Datasheet, ComponentLink2URL=http://www.ti.com/lit/ds/symlink/tps62840.pdf, Device Class L1="Integrated Circuits (ICs)", Device Class L2="Power Management ICs", Device Class L3="Voltage Regulators - Switching", Digikey Description="ULTRA LOW IQ BUCK CONVERTER", Height=1mm, Ipc Land Pattern Name=DFN200X150X100-8, Lead Free=Yes, Manufacturer Part Number=TPS62840DLCR, Max Duty Cycle=100%, Mouser Description="60-nA IQ, 1.8-V to 6.5-VIN, high-efficiency 750-mA step-down converter 8-VSON-HR -40 to 125", Number Of Outputs=1, Octopart=https://octopart.com/tps62840dlcr-texas+instruments-103121111, Output Type=AdjustableProgrammable, RoHS=TRUE, Standoff Height=0mm, Switching Topology=Buck, Temperature Range High=+125°C
U3: library part CMP-2000-04924-1, "Single-Chip USB to URAT Bridge, 3.3 V, -40 to 85 degC, 28-Pin QFN, RoHS, Tape and Reel", Manufacturer="Silicon Labs", Operating Supply Voltage (Max)=3.6V, Operating Supply Voltage (Min)=3V, Operating Supply Voltage (Typ)=3.3V, Operating Temperature (Max)=85C, Operating Temperature (Min)=-40C, Operating Temperature Classification=Industrial, Package Description="28-Pin Quad-Flat No-Leads Package, Body 5 x 5 mm, Pitch 0.5 mm", Package Reference=QFN-28, Package Type=QFNEP, Supply Current=26mA, Data Rate=1000kbps, Datasheet URL=http://www.mouser.com/ds/2/368/CP2102-9-247052.pdf, Datasheet Version="Rev. 1.6, 12/2013", Interface Circuit Standard 1=RS-232, Manufacturer URL=http://www.silabs.com/, Mounting=SurfaceMount, Number of Channels=1, Package URL=http://www.silabs.com/Support%20Documents/TechnicalDocs/C8051T61x.pdf, Packaging=TapeandReel, Pin Count=28, Rad Hardened=No, Transmitter and Receiver FIFO Counter=No
U4: "BMI323 / IMU combining accelerometer and gyroscope /  / Accelerometer (A): 16-bit / ±2 g: 16384 LSB/g / ±4 g: 8192 LSB/g / ±8 g: 4096 LSB/g / ±16 g: 2048 LSB/g /  / Gyroscope (G): 16-bit / ±125 °/s: 262.1 LSB/°/s / ±250 °/s: 131.1 LSB/°/s / ±500 °/s: 65.5 LSB/°/s / ±1000 °/s: 32.8 LSB/°/s / ±2000 °/s: 16.4 LSB/°/s /  / Output data rate (ODR) / (A): 12.5 Hz … 6.4 kHz / (G): 25 Hz … 6.4 kHz"
Y1: library part CMP-27762-014975-1, "Crystal 32MHz ±30ppm (Tol) ±30ppm (Stability) 10pF FUND 50Ω 4-Pin SMD T/R", Case/Package=CSMD, ESR (Equivalent Series Resistance)=50R, Frequency Stability=30ppm, Load Capacitance=10pF, Max Operating Temperature=70°C, Min Operating Temperature=-20°C, Package Quantity=1000, Depth=2.5mm, Frequency=32MHz, Frequency Tolerance=30ppm, Height=1mm, Lead Free="Lead Free", Length=3.2mm, Mount="Surface Mount", Number of Pins=4, Packaging="Tape and Reel", Series=ABM8G, Series Resistance=50R, Termination=SMD/SMT, Tolerance=30ppm, Width=2.5mm

## Free pads (board coordinates)
  round 0 hole 3.3 mask+0: 8(3.556,43.18) 8(19.304,43.18)

## Via types
v1: diameter 0.25, hole 0.15, Top Layer (sig) to Bottom Layer (sig), tented both sides, 72 vias
v2: diameter 0.5, hole 0.2, Top Layer (sig) to Bottom Layer (sig), 25 vias
v3: diameter 0.25, hole 0.15, Top Layer (sig) to Bottom Layer (sig), 5 vias
v4: diameter 0.25, hole 0.25, Top Layer (sig) to Bottom Layer (sig), tented both sides, 1 vias

## Nets (pads, with @x,y where several pads share a name; then routed paths per layer and width w, separated by ;. In a path a pad name is that pad's centre, name@x,y a point inside that pad or via, vN(x,y) a via of type N, cw(c..) or ccw(c..) an arc to the next point about the centre after c; other vN are vias at no path point)
3V3: C1.2 C2.2 C3.2 C4.1 C5.2 C17.1 C18.1 C19.1 C20.1 C21.1 C22.1 C23.1 C24.1 D1.1 L5.2 P1.1 P3.1 R1.2 R8.1 R12.1 U1.10 U1.22 U1.36 U1.47 U1.48 U2.8 U3.6 U3.7 U4.5 U4.8 | length 115.1
  Top Layer (sig) w0.25: D1.1 2.949,31.391 4.039,30.302 4.039,28.729 4.818,27.95 R8.1 10.063,25.472 10.058,25.467 ; U4.8 4.402,24.188 C22.1 C21.1 ; U4.5 6.099,24.463 C21.1 ; v1(6.731,12.852) 6.932,13.053 6.932,13.302 7.071,13.441 8.368,13.441 U1.22 ; v1(7.341,10.312) 7.928,10.312 R1.2 ; U2.8 9.072,33.304 9.22,33.452 C17.1 ; C1.2@9.687,19.66 9.687,19.168 v1(9.822,19.033) U1.10 ; C17.1 9.818,33.451 9.929,33.34 9.929,33.193 10.204,32.918 10.623,32.918 10.77,32.772 10.77,32.408 L5.2 ; R8.1@10.113,27.95 10.213,28.05 10.213,28.475 10.77,29.032 10.77,29.419 10.842,29.492 C19.1 ; 11.735,32.351 11.77,32.386 ; v1(13.056,20.752) 15.748,20.752 15.964,20.968 C20.1@15.964,23.622 ; U3.7 13.564,30.958 13.564,31.521 13.335,31.75 12.852,31.75 12.154,31.051 C19.1 ; C3.2@13.816,10.853 C3.2 13.908,10.741 13.773,10.876 13.773,11.094 13.447,11.42 U1.36@13.447,11.938 ; U1.47 14.918,16.645 15.326,17.053 C5.2 15.345,17.054 C4.1 ; U1.48 14.073,17.043 14.503,17.043 14.857,17.397 14.857,17.981 15.037,18.161 15.323,18.161 C4.1 ; U3.6 14.074,31.976 14.072,31.979 14.072,32.428 C23.1 13.912,32.413 C24.1 12.775,32.413 12.748,32.386 11.77,32.386 ; v1(14.173,11.582) 13.818,11.938 U1.36@13.447,11.938 ; v1(15.316,18.771) 15.316,18.209 C4.1 ; v1(15.951,24.181) 15.964,24.168 C20.1@15.964,23.622 ; R12.1 19.369,38.746 20.16,37.956 22.042,37.956 22.314,37.684 22.314,31.253 P3.1 ; C21.1 10.058,25.467 ; 10.058,25.467 13.199,25.467 13.97,24.696 P1.1 C20.1@15.964,23.622 ; L5.2 11.77,32.386 ; L5.2 10.842,32.335 C19.1 ; U1.36@13.447,11.938 13.447,11.97 U1.36 13.422,11.963 U1.36@13.447,11.938 ; C4.1 C4.1
  Bottom Layer (sig) w0.25: v1(6.731,12.852) 6.731,10.922 v1(7.341,10.312) 7.849,9.804 9.322,9.804 10.211,10.693 12.065,10.693 12.294,10.922 13.513,10.922 v1(14.173,11.582) 14.58,11.989 14.58,13.217 14.5,13.296 14.5,18.361 14.91,18.771 v1(15.316,18.771) 15.316,23.978 15.519,24.181 v1(15.951,24.181) 15.951,24.79 16.319,25.158 18.528,25.158 19.025,25.654 19.025,29.388 19.736,30.099 P3.1 ; v1(9.822,19.033) 11.337,19.033 v1(13.056,20.752)
CC1: J1.A5 R3.2 | length 6.5
  Top Layer (sig) w0.165: J1.A5 12.68,39.858 13.335,40.513 16.637,40.513 16.891,40.259 17.343,40.259 R3.2
CC2: J1.B5 R4.2 | length 11.4
  Top Layer (sig) w0.165: J1.B5 9.68,40.668 9.906,40.894 18.034,40.894 18.223,40.705 18.223,40.351 R4.2
CSB: U1.9 U4.12 | length 9.5
  Top Layer (sig) w0.165: U4.12 5.099,20.707 5.664,20.142 8.53,20.142 8.54,20.152 10.053,20.152 10.222,19.983 U1.9
GND: C1.1 C2.1 C3.1 C4.2 C5.1 C6.2 C7.1 C8.2 C9.2 C10.2 C11.2 C12.2 C13.2 C14.2 C15.2 C16.2 C17.2 C18.2 C19.2 C20.2 C21.2 C22.2 C23.2 C24.2 D2.1 FL1.5 FL1.8 J1.A1-B12 J1.B1-A12 P1.3 P1.5 P1.9 P2.10 P3.2 R2.1 R3.1 R4.1 R7.1 SW1.A1 SW1.A2 SW1.G1 U1.32 U1.44 U1.49 U2.1 U2.6 U3.3 U3.29 U4.6 U4.7 Y1.2 Y1.4 | length 37.4
  Top Layer (sig) w0.165: v1(5.74,13.411) 6.301,13.411 C2.1 ; v1(8.23,19.634) C1.1@9.047,19.634 ; v1(9.169,7.696) 9.179,7.706 9.713,7.706 C9.2 ; v1(9.279,10.354) 9.285,10.348 9.823,10.348 C7.1 ; v1(9.703,9.017) 9.716,9.03 10.113,9.03 C8.2 ; P1.5 v1(11.43,24.536) ; v1(11.822,11.175) U1.32 ; v1(12.294,9.728) C12.2 ; P1.3 v1(12.7,24.511) ; v2(12.872,15.395) 12.922,15.445 U1.44 ; C3.1@14.57,10.741 14.573,10.744 v1(15.164,10.744) ; v1(15.24,9.068) Y1.4 ; C4.2 16.785,18.182 v1(16.789,18.186) ; C5.1 16.122,17.069 v1(16.815,17.069) ; C10.2 16.836,13.762 17.598,13.762 v1(17.602,13.767) ; C11.2 16.847,12.847 17.43,12.847 17.579,12.698 v1(17.602,12.698) ; Y1.2 17.882,11.266 v1(17.882,10.211) ; v1(20.726,33.833) 20.71,33.817 20.71,33.741 19.989,33.02 SW1.A1 19.889,33.02 19.314,33.595 SW1.G1 19.314,35.645 19.939,36.27 SW1.A2 19.989,37.12 20.71,36.399 20.71,36.364 v1(20.726,36.347)
  Top Layer (sig) w0.25: v1(4.394,26.365) 4.394,25.942 C22.2 ; v1(4.496,32.995) 4.523,32.967 C16.2 ; U4.7 5.099,25.063 v1(5.103,25.067) ; v1(5.588,37.567) 5.598,37.577 R2.1 ; U4.6 v1(5.599,25.067) ; v1(6.096,26.365) 6.096,25.942 C21.2 ; v1(7.29,33.706) 7.29,33.304 U2.1 ; C14.2 7.595,36.294 v1(7.595,36.779) ; v1(8.001,32.309) 8.006,32.304 U2.6 ; v1(8.026,36.551) 8.454,36.551 C13.2 ; v1(8.23,37.49) J1.B1-A12 ; R7.1 8.606,28.834 v1(8.611,28.829) ; v1(9.449,29.388) 10.012,29.388 C18.2 ; v1(9.881,31.039) 10.367,31.039 C19.2 ; v1(10.541,33.985) 10.541,33.464 C17.2 ; FL1.5 11.167,34.376 v1(11.176,34.366) ; v1(12.37,32.893) 12.375,32.888 C24.2 ; FL1.8 12.667,34.45 v1(12.675,34.442) ; v1(13.462,33.071) 13.571,33.071 C23.2 ; U1.44 14.908,15.445 v1(14.935,15.418) ; v1(14.63,37.592) J1.A1-B12 ; C15.2 15.288,36.553 v1(15.291,36.551) ; v2(15.074,29.573) 15.234,29.573 15.574,29.913 U3.3 ; C6.2 16.659,15.828 v1(16.662,15.824) ; C20.2 16.439,23.597 v1(16.84,23.597) ; v1(17.348,39.065) R3.1 ; v1(18.313,39.04) 18.315,39.042 R4.1 ; D2.1 v1(21.436,38.631)
  other v2: 9.572,13.195 10.672,13.195 11.772,13.195 12.872,13.195 9.572,14.295 10.672,14.295 11.772,14.295 12.872,14.295 9.572,15.395 10.672,15.395 11.772,15.395 9.572,16.495 10.672,16.495 11.772,16.495 12.872,16.495 13.974,27.373 15.074,27.373 16.174,27.373 13.974,28.473 15.074,28.473 16.174,28.473 13.974,29.573 16.174,29.573
INT1: U1.5 U4.4 | length 11
  Top Layer (sig) w0.165: U4.4 6.803,24.146 7.126,24.146 7.315,23.957 7.315,21.036 7.884,20.467 11.655,20.467 11.822,20.3 U1.5
INT2: U1.11 U4.9 | length 11.2
  Top Layer (sig) w0.165: U4.9 4.395,23.646 4.063,23.646 3.962,23.546 3.962,21.197 4.227,20.933 4.227,19.345 4.674,18.898 8.966,18.898 9.422,18.442 U1.11
NetAE1_1: AE1.1 C9.1 L4.2 | length 4.3
  Top Layer (sig) w0.116: C9.1 10.444,7.704 L4.2 11.428,4.446 AE1.1
NetC6_1: C6.1 FB1.1 L1.2 U1.45 | length 5.8
  Top Layer (sig) w0.25: U1.45 15.357,15.845 15.43,15.772 15.43,15.537 15.595,15.372 16.785,15.372 16.967,15.189 16.967,14.819 FB1.1 17.946,14.811 18.72,15.585 L1.2
NetC7_2: C7.2 L2.2 L3.1 | length 1.7
  Top Layer (sig) w0.116: C7.2 10.505,10.325 L2.2 L3.1
NetC8_1: C8.1 L3.2 L4.1 | length 1.7
  Top Layer (sig) w0.116: C8.1 11.421,9.042 L3.2 L4.1
NetC10_1: C10.1 C11.1 C12.1 FB1.2 U1.33 U1.43 | length 20.1
  Top Layer (sig) w0.2: C12.1 12.294,10.8 12.375,10.718 12.574,10.718 12.768,10.525 12.768,10.081 14.731,8.118 18.583,8.118 18.73,8.264 18.73,12.071 18.485,12.316 16.604,12.316 16.359,12.561 16.359,12.76 16.273,12.846 C11.1@16.227,12.846
  Top Layer (sig) w0.25: U1.33 12.222,10.963 12.294,10.891 C12.1 ; U1.43 14.717,15.045 14.744,15.018 15.075,15.018 15.085,15.028 15.383,15.028 15.599,14.812 FB1.2 ; C11.1@16.227,12.846 16.227,13.753 C10.1 16.237,13.772 16.237,14.797 FB1.2
NetD1_2: D1.2 R11.1 | length 5.7
  Top Layer (sig) w0.165: D1.2 1.549,34.921 0.867,35.604 0.867,37.297 1.598,38.028 R11.1
NetD1_3: D1.3 R10.1 | length 2.1
  Top Layer (sig) w0.165: D1.3 3.166,36.667 R10.1
NetD1_4: D1.4 R9.1 | length 2.3
  Top Layer (sig) w0.165: D1.4 1.917,36.818 1.917,37.52 2.382,37.985 R9.1
NetD2_2: D2.2 R12.2 | length 1.3
  Top Layer (sig) w0.165: R12.2 20.632,40.273 D2.2
NetJ1_1: J1.1 J1.2 J1.3 J1.4 R2.2 | length 18.5
  Top Layer (sig) w0.5: R2.2 5.607,39.031 7.101,39.031 J1.2
  Bottom Layer (sig) w0.5: J1.2 J1.4 J1.3 J1.1
NetL1_1: L1.1 U1.46 | length 5.1
  Top Layer (sig) w0.165: U1.46 17.654,16.245 18.199,16.79 18.273,16.79 18.72,17.237 L1.1
NetL2_1: L2.1 U1.31 | length 1.1
  Top Layer (sig) w0.116: U1.31 11.425,11.992 11.425,10.928 L2.1
NetL5_1: L5.1 U2.7 | length 1.3
  Top Layer (sig) w0.25: U2.7 9.373,32.804 9.691,32.486 L5.1
NetR5_2: R5.2 U2.3 | length 1.6
  Top Layer (sig) w0.25: R5.2 5.991,31.731 6.564,32.304 U2.3
NetR6_2: R6.2 U2.4 | length 2.7
  Top Layer (sig) w0.25: R6.2 5.237,30.577 5.337,30.677 5.337,30.866 5.702,31.231 6.553,31.231 7.126,31.804 U2.4
NetR7_2: R7.2 U2.5 | length 1.3
  Top Layer (sig) w0.25: U2.5 8.603,31.804 8.603,30.502 R7.2
NetR8_2: R8.2 U3.9 | length 3
  Top Layer (sig) w0.25: R8.2 10.828,27.965 11.252,27.965 11.455,28.169 11.455,29.134 11.795,29.473 U3.9
NetU1_34: U1.34 Y1.1 | length 7.3
  Top Layer (sig) w0.165: U1.34 12.622,11.255 13.1,10.776 13.1,10.254 13.421,9.933 15.329,9.933 15.396,10 17.047,10 17.88,9.168 Y1.1
NetU1_35: U1.35 Y1.3 | length 5.1
  Top Layer (sig) w0.165: U1.35 13.022,11.3 13.415,10.906 13.415,10.384 13.552,10.248 15.064,10.248 15.131,10.315 15.327,10.315 16.18,11.168 Y1.3
nRST: P1.10 P2.9 R1.1 SW1.B1 SW1.B2 U1.30 | length 58.2
  Top Layer (sig) w0.165: v1(8.661,10.897) 8.661,10.329 R1.1 ; R1.1@8.73,10.311 9.22,10.801 10.674,10.801 11.022,11.149 U1.30 ; v1(21.514,31.953) 21.514,32.995 SW1.B1 SW1.B2
  Bottom Layer (sig) w0.165: P2.9 1.735,27.524 2.448,27.524 3.048,26.924 3.048,23.622 3.556,23.114 6.539,23.114 7.325,22.329 7.978,22.329 8.001,22.352 P1.10 ; v1(8.661,10.897) 8.659,10.899 8.659,12.223 8.687,12.251 8.687,13.388 7.186,14.889 7.186,16 7.899,16.713 9.375,18.188 9.375,18.487 8.987,18.874 7.59,18.874 7.493,18.971 7.493,20.32 7.976,20.803 7.976,21.438 P1.10 ; v1(21.514,31.953) 20.904,31.344 12.903,31.344 12.471,30.912 12.471,25.502 12.116,25.146 8.407,25.146 7.95,24.689 7.95,23.292 P1.10
P0.00: P2.2 U1.23 | length 8
  Top Layer (sig) w0.165: P2.2 4.298,9.779 7.564,13.045 U1.23
P0.01: P2.1 U1.24 | length 8.9
  Top Layer (sig) w0.165: P2.1 1.848,7.387 2.448,7.387 7.705,12.645 U1.24
P1.02: P3.4 U1.3 | length 12.2
  Top Layer (sig) w0.165: U1.3 12.622,19.302 13.284,19.964 17.346,19.964 17.956,20.574 17.956,21.535 v1(17.96,21.539)
  Bottom Layer (sig) w0.165: v1(17.96,21.539) 17.96,21.867 18.571,22.479 P3.4
P1.03: P3.3 U1.4 | length 14.3
  Top Layer (sig) w0.165: U1.4 12.222,19.384 13.132,20.295 17.221,20.295 17.602,20.676 v1(17.602,21.996)
  Bottom Layer (sig) w0.165: v1(17.602,21.996) 18.44,22.835 19.99,22.835 21.16,24.005 P3.3
P1.09: P3.10 U1.37 | length 11.7
  Top Layer (sig) w0.165: U1.37 15.007,12.645 v1(15.011,12.649)
  Bottom Layer (sig) w0.165: v1(15.011,12.649) 17.145,12.649 17.454,12.34 18.36,12.34 19.091,11.61 19.091,7.579 19.431,7.239 P3.10
P1.10: P3.9 U1.38 | length 9.6
  Top Layer (sig) w0.165: U1.38 14.077,13.05 15.235,13.05 v1(15.24,13.056)
  Bottom Layer (sig) w0.165: v1(15.24,13.056) 18.364,13.056 19.406,12.014 19.406,10.135 19.812,9.728 21.109,9.728 P3.9
P1.11: P3.8 U1.39 | length 7.6
  Top Layer (sig) w0.165: U1.39 14.08,13.453 14.891,13.453 v1(14.9,13.462)
  Bottom Layer (sig) w0.165: v1(14.9,13.462) 17.401,13.462 17.454,13.409 18.62,13.409 19.71,12.319 P3.8
P1.12: P3.7 U1.40 | length 7.5
  Top Layer (sig) w0.165: U1.40 14.073,13.844 v1(15.24,13.843) v1(15.24,13.843)
  Bottom Layer (sig) w0.165: v1(15.24,13.843) 17.173,13.843 17.454,14.124 19.124,14.124 19.859,14.859 P3.7
P1.13: P3.6 U1.41 | length 9.5
  Top Layer (sig) w0.165: U1.41 14.082,14.234 14.89,14.234 v1(14.9,14.224)
  Bottom Layer (sig) w0.165: v1(14.9,14.224) 17.108,14.224 17.324,14.439 18.994,14.439 19.736,15.182 19.736,17.018 20.117,17.399 P3.6
P1.14: P3.5 U1.42 | length 11.7
  Top Layer (sig) w0.165: U1.42 14.079,14.638 15.155,14.638 v1(15.164,14.628)
  Bottom Layer (sig) w0.165: v1(15.164,14.628) 17.066,14.628 17.193,14.755 18.844,14.755 19.406,15.316 19.406,19.406 19.939,19.939 P3.5
P2.01: R9.2 U1.12 | length 28.8
  Top Layer (sig) w0.165: R9.2 2.385,39.032 2.385,39.494 v1(2.388,39.497) ; v3(7.823,21.869) v3(7.823,22.708) ; v1(8.585,18.517) 8.601,18.5 8.836,18.5 9.019,18.317 9.019,17.697 U1.12
  Bottom Layer (sig) w0.165: v1(2.388,39.497) 3.683,39.497 4.064,39.116 4.064,27.051 4.318,26.797 7.112,26.797 7.62,26.289 7.62,22.934 7.823,22.731 v3(7.823,22.708) ; v3(7.823,21.869) 7.661,21.707 7.661,20.955 7.112,20.406 7.112,18.796 7.391,18.517 v1(8.585,18.517)
P2.02: R10.2 U1.13 | length 26.5
  Top Layer (sig) w0.165: R10.2@3.191,39.029 R10.2 3.141,39.029 2.765,38.653 2.765,37.794 2.267,37.297 2.267,31.454 3.647,30.074 3.647,21.067 3.912,20.803 3.912,18.898 5.746,17.063 7.653,17.063 7.671,17.044 U1.13@8.371,17.044
P2.03: R11.2 U1.14 | length 27.9
  Top Layer (sig) w0.165: R11.2 1.056,39.029 0.867,38.84 0.867,37.742 0.552,37.427 0.552,35.473 0.867,35.158 0.867,32.408 3.292,29.984 3.292,20.977 3.556,20.713 3.556,18.796 5.707,16.645 U1.14
P2.04: P2.8 U1.15 U4.1 | length 20.8
  Top Layer (sig) w0.165: P2.8 1.7,23.798 2.977,22.521 2.977,20.846 3.2,20.623 3.2,18.644 5.599,16.245 U1.15 ; v3(6.756,21.946) 6.759,21.948 6.759,22.686 U4.1
  Bottom Layer (sig) w0.165: P2.8 1.7,24.081 3.302,22.479 6.223,22.479 v3(6.756,21.946)
P2.05: P2.7 U1.16 | length 11.1
  Top Layer (sig) w0.165: P2.7 2.662,21.517 2.662,20.716 2.845,20.533 2.845,18.491 5.491,15.845 U1.16
P2.06: P2.6 U1.17 U4.13 | length 15.2
  Top Layer (sig) w0.165: P2.6 1.7,19.128 5.383,15.445 U1.17 ; U4.13 5.606,22.518 5.606,21.826 v3(5.613,21.819)
  Bottom Layer (sig) w0.165: P2.6 5.08,19.939 5.613,20.472 v3(5.613,21.819)
P2.08: P2.5 U1.19 U4.14 | length 16.5
  Top Layer (sig) w0.165: P2.5 1.7,16.309 3.364,14.645 U1.19 ; v3(6.096,21.615) 6.098,21.617 U4.14 U4.14
  Bottom Layer (sig) w0.165: P2.5 1.86,17.559 1.86,18.116 3.302,19.558 5.207,19.558 6.096,20.447 v3(6.096,21.615)
P2.09: P2.4 U1.20 | length 6.9
  Top Layer (sig) w0.165: P2.4 2.55,14.859 3.164,14.245 U1.20
P2.10: P2.3 U1.21 | length 7.4
  Top Layer (sig) w0.165: P2.3@1.751,12.37 P2.3 3.31,13.929 7.463,13.929 7.547,13.845 U1.21
SWCLK: P1.4 U1.26 | length 16.2
  Top Layer (sig) w0.165: U1.26@9.423,11.994 9.423,11.38 9.585,11.218 9.636,11.218 v1(9.652,11.201)
  Bottom Layer (sig) w0.165: v1(9.652,11.201) 9.652,11.224 9.881,11.453 9.881,11.913 10.018,12.05 13.421,12.05 13.767,12.395 13.767,17.247 13.589,17.424 13.589,21.463 P1.4
SWDIO: P1.2 U1.25 | length 16.9
  Top Layer (sig) w0.165: U1.25 9.019,11.992 9.019,11.171 9.051,11.139 v1(9.051,11.116)
  Bottom Layer (sig) w0.165: v1(9.051,11.116) 9.324,10.844 9.8,10.844 10.691,11.735 13.64,11.735 14.148,12.243 14.148,13.102 14.142,13.107 14.142,17.735 13.97,17.907 P1.2
SWO: P1.6 U1.18 | length 13.2
  Top Layer (sig) w0.165: v4(7.544,15.037) 7.548,15.041 8.368,15.041 U1.18
  Bottom Layer (sig) w0.165: v4(7.544,15.037) 7.544,15.912 9.69,18.058 9.69,18.617 9.118,19.189 7.905,19.189 7.808,19.286 7.808,20.117 8.306,20.615 8.306,21.184 8.767,21.644 10.722,21.644 P1.6
UART_RX: U1.2 U3.25 | length 15.9
  Top Layer (sig) w0.165: U1.2 13.022,19.219 13.437,19.634 17.461,19.634 18.317,20.49 18.317,28.08 17.935,28.462 17.56,28.462 U3.25
UART_TX: U1.1 U3.26 | length 16.7